# EAGLE board MotorController (EAGLE 5.10)
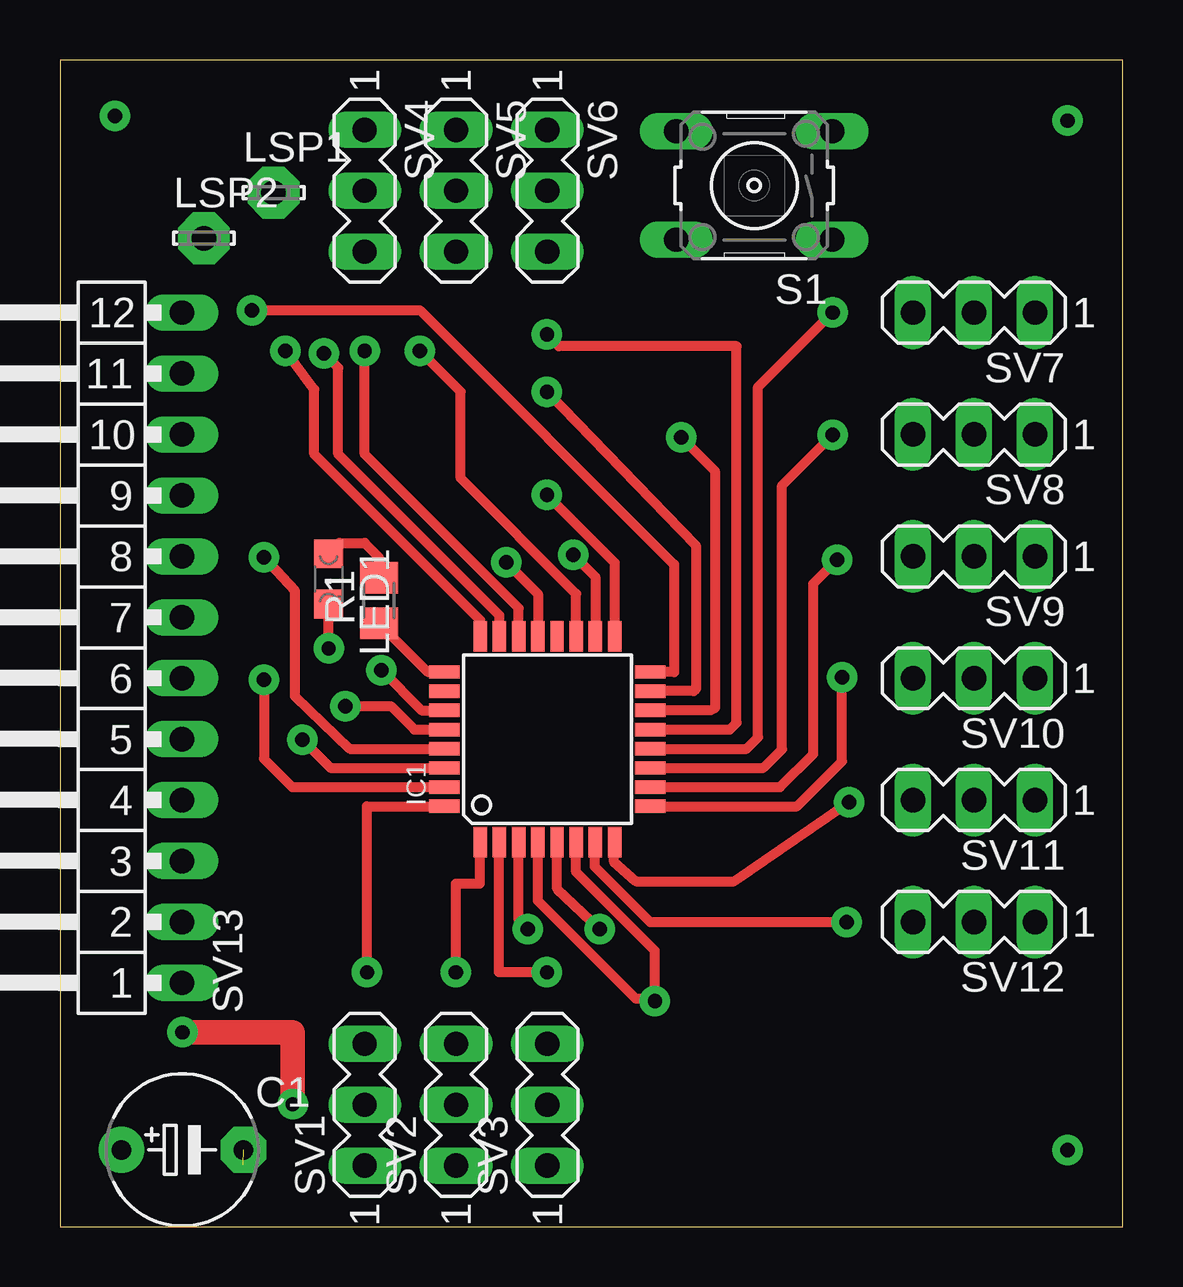
[diagram p0: board, top side]
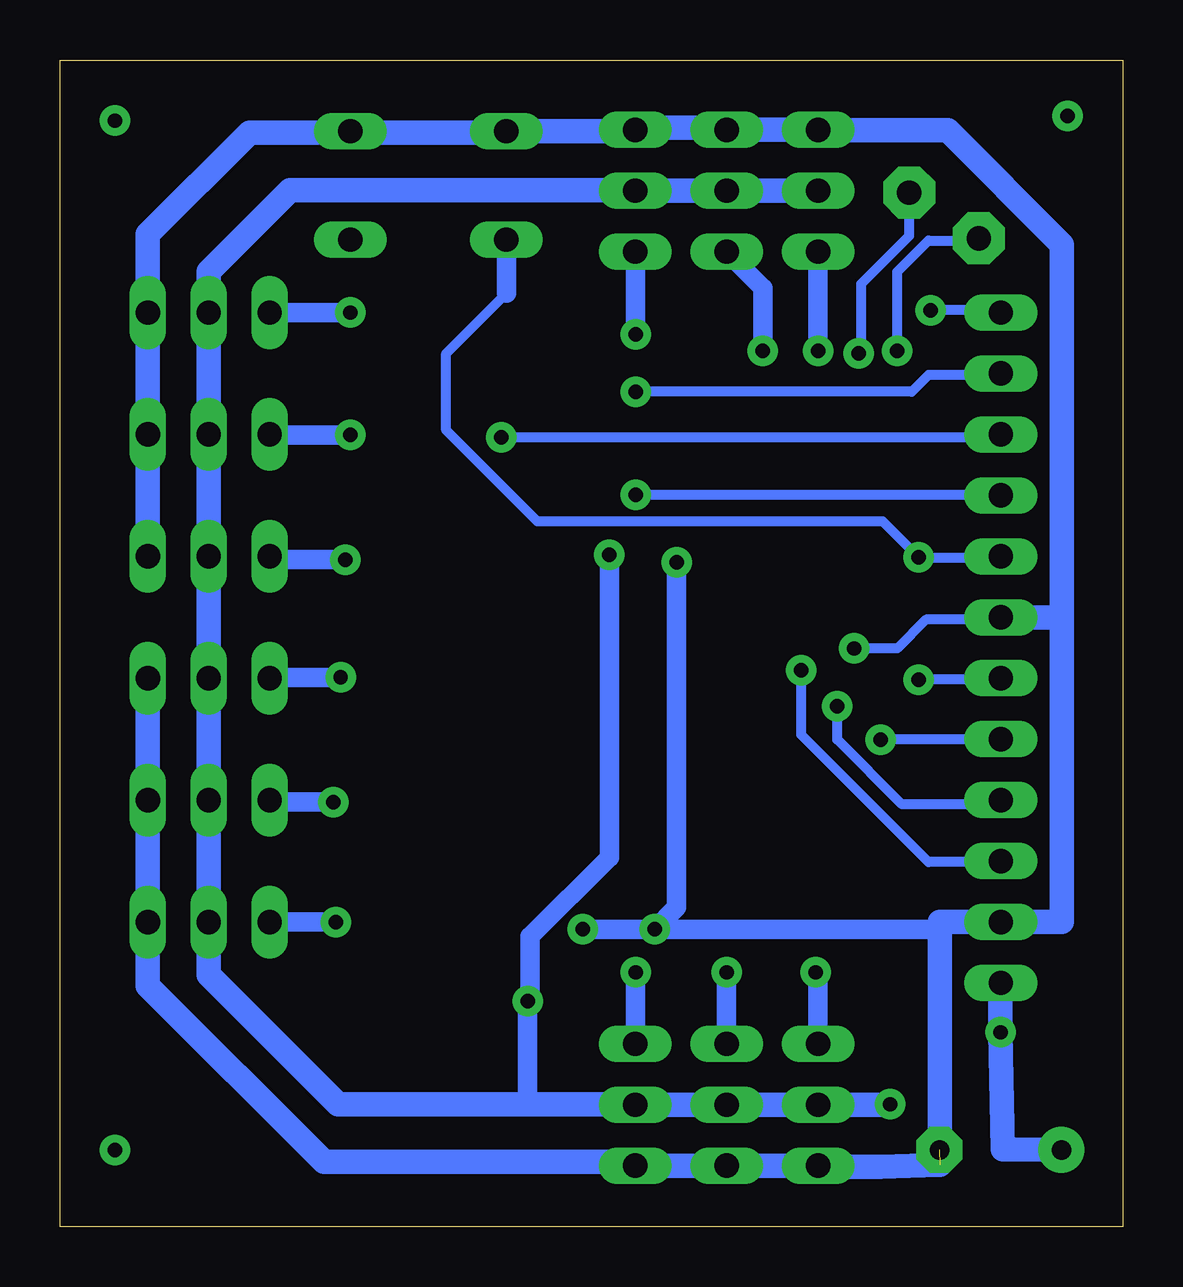
[diagram p1: board, bottom side, seen from below]

Size 44.3 x 48.63 mm. Coordinates in mm from the lower left corner, seen from the top.
Outline: 0,0 44.3,0 44.3,48.63 0,48.63 0,0
Copper layers (1*16): Top 0.035mm / dielectric 1.5mm / Bottom 0.035mm
Design rules "default": minimum track width 10mil, minimum drill 24mil, track to track 8mil, track to pad 8mil, pad to pad 8mil, via to via 8mil, smd to smd 8mil, copper to edge 40mil, drill to drill 8mil, minimum pad ring 10mil, minimum via ring 8mil, stop-mask expansion 4mil, vias tented up to drill 0mil, thermal gap 10mil

## Footprints (pad centres in the part's own frame; a part is rotated, then mirrored left to right if it is on the bottom)
E5-6 = drill 0.813 pad 1.905 round: + -2.54,0 | drill 0.813 pad 1.905 octagon: - 2.54,0
TQFP32-08 = smd 1.27 x 0.559: 1 -4.293,2.8; 2 -4.293,2; 3 -4.293,1.2; 4 -4.293,0.4; 5 -4.293,-0.4; 6 -4.293,-1.2; 7 -4.293,-2; 8 -4.293,-2.8; 17 4.293,-2.8; 18 4.293,-2; 19 4.293,-1.2; 20 4.293,-0.4; 21 4.293,0.4; 22 4.293,1.2; 23 4.293,2; 24 4.293,2.8 | smd 0.559 x 1.27: 9 -2.8,-4.293; 10 -2,-4.293; 11 -1.2,-4.293; 12 -0.4,-4.293; 13 0.4,-4.293; 14 1.2,-4.293; 15 2,-4.293; 16 2.8,-4.293; 25 2.8,4.293; 26 2,4.293; 27 1.2,4.293; 28 0.4,4.293; 29 -0.4,4.293; 30 -1.2,4.293; 31 -2,4.293; 32 -2.8,4.293
CHIPLED_0805 = smd 1.2 x 1.2: A 0,-1.05; C 0,1.05
LSP10 = drill 1.016 pad 2.159 octagon: MP 0,0
M0805 = smd 1.3 x 1.6: 1 -0.95,0; 2 0.95,0
B3F-10XX = drill 1.016 long: 1 -3.251,2.261; 2 3.251,2.261; 3 -3.251,-2.261; 4 3.251,-2.261
MA03-1 = drill 1.016 long: 1 -2.54,0; 2 0,0; 3 2.54,0
MA12-1W = drill 1.016 long: 1 -13.97,0; 2 -11.43,0; 3 -8.89,0; 4 -6.35,0; 5 -3.81,0; 6 -1.27,0; 7 1.27,0; 8 3.81,0; 9 6.35,0; 10 8.89,0; 11 11.43,0; 12 13.97,0

## Placement (x,y rotation side)
C1  [E5-6]  5.1,3.2 0 top
IC1  MEGA8-AI  [TQFP32-08]  20.32,20.32 90 top
LED1  [CHIPLED_0805]  11.2,27 180 top
LSP1  LSP10  [LSP10]  8.9,43.1 0 top
LSP2  LSP10  [LSP10]  6,41.2 0 top
R1  [M0805]  13.3,26.1 90 top
S1  [B3F-10XX]  28.94,43.4 180 top
SV1  [MA03-1]  12.7,5.08 90 top
SV2  [MA03-1]  16.51,5.08 90 top
SV3  [MA03-1]  20.32,5.08 90 top
SV4  [MA03-1]  12.7,43.18 270 top
SV5  [MA03-1]  16.51,43.18 270 top
SV6  [MA03-1]  20.32,43.18 270 top
SV7  [MA03-1]  38.1,38.1 180 top
SV8  [MA03-1]  38.1,33.02 180 top
SV9  [MA03-1]  38.1,27.94 180 top
SV10  [MA03-1]  38.1,22.86 180 top
SV11  [MA03-1]  38.1,17.78 180 top
SV12  [MA03-1]  38.1,12.7 180 top
SV13  [MA12-1W]  5.08,24.13 90 top

## Library data of the parts
C1 R1 = resistor
IC1 = atmel
LED1 = led
LSP1 LSP2 = solpad
S1 = switch-omron
SV1-SV13 = con-lstb

## Nets
GND: C1.- IC1.3 IC1.5 IC1.21 LED1.C S1.4 SV1.1 SV2.1 SV3.1 SV4.1 SV5.1 SV6.1 SV7.1 SV8.1 SV9.1 SV10.1 SV11.1 SV12.1 SV13.2 SV13.7
IN1: IC1.12 SV7.3
IN2: IC1.11 SV8.3
IN3: IC1.10 SV9.3
IN4: IC1.9 SV10.3
IN5: IC1.8 SV11.3
IN6: IC1.7 SV12.3
MISO: IC1.16 SV13.12
MOSI: IC1.15 SV13.11
N$1: IC1.23 LSP1.MP
N$2: IC1.24 LSP2.MP
N$3: IC1.25 R1.1
N$4: LED1.A R1.2
OUT1: IC1.32 SV1.3
OUT2: IC1.1 SV2.3
OUT3: IC1.2 SV3.3
OUT4: IC1.22 SV4.3
OUT5: IC1.19 SV5.3
OUT6: IC1.13 SV6.3
RESET: IC1.29 S1.2 SV13.8
RXD: IC1.30 SV13.5
SCK: IC1.17 SV13.9
SCL: IC1.28 SV13.4
SDA: IC1.27 SV13.3
SS: IC1.14 SV13.10
TXD: IC1.31 SV13.6
VCC: C1.+ IC1.4 IC1.6 IC1.18 SV1.2 SV2.2 SV3.2 SV4.2 SV5.2 SV6.2 SV7.2 SV8.2 SV9.2 SV10.2 SV11.2 SV12.2 SV13.1

## Tracks (layer width: path | path; a pad name or v marks a point on that pad's centre or on a via)
GND  (via drill 0.6 pad 1.27)  (1 unrouted)
  Top 0.406: IC1.3 19.12,12.78 v19.5,12.4 | IC1.5 20.72,14.08 v22.5,12.4 | IC1.21 19.92,26.38 v18.6,27.7 | v11.2,24.1 LED1.C
  Bottom 0.406: 7.62,12.7 7.92,12.4 | 2.54,25.5 2.64,25.4 | 12.66,2.5 SV1.1 | SV3.1 20.48,2.7 | v11.2,24.1 9.4,24.1 8.2,25.3 5.18,25.3 SV13.7
  Bottom 0.813: 7.92,12.4 v19.5,12.4 | v19.5,12.4 v22.5,12.4 | v18.6,27.7 18.6,13.3 v19.5,12.4
  Bottom 1.016: 2.64,25.4 SV13.7 | 12.66,2.5 10.1,2.5 7.62,2.58 7.62,12.7 SV13.2 2.54,12.7 2.54,25.5 2.54,40.94 7.3,45.7 12.68,45.7 SV4.1 SV5.1 16.82,45.72 16.9,45.8 20.24,45.8 SV6.1 20.38,45.66 S1.4 25.75,45.6 36.4,45.6 40.64,41.36 SV7.1 SV8.1 SV9.1 | SV1.1 SV2.1 SV3.1 | 20.48,2.7 33.3,2.7 40.64,10.04 SV12.1 SV11.1 SV10.1
IN1  (via drill 0.6 pad 1.27)
  Top 0.406: IC1.12 28.62,19.92 29.1,20.4 29.1,35 v32.2,38.1
  Bottom 0.406: v35.5,38.1 SV7.3
  Bottom 0.813: v32.2,38.1 v35.5,38.1
IN2  (via drill 0.6 pad 1.27)
  Top 0.406: IC1.11 29.32,19.12 30.1,19.9 30.1,30.9 v32.2,33
  Bottom 0.406: 35.54,33 SV8.3
  Bottom 0.813: v32.2,33 35.54,33
IN3  (via drill 0.6 pad 1.27)
  Top 0.406: IC1.10 30.02,18.32 31.4,19.7 31.4,26.8 v32.4,27.8
  Bottom 0.406: 35.42,27.8 SV9.3
  Bottom 0.813: v32.4,27.8 35.42,27.8
IN4  (via drill 0.6 pad 1.27)
  Top 0.406: IC1.9 30.72,17.52 32.6,19.4 v32.6,22.9
  Bottom 0.406: v35.5,22.9 35.52,22.9 SV10.3
  Bottom 0.813: v32.6,22.9 v35.5,22.9
IN5  (via drill 0.6 pad 1.27)
  Top 0.406: IC1.8 23.1,16.03 23.1,15.2 24,14.4 28.1,14.4 v32.9,17.7
  Bottom 0.406: v35.5,17.7 35.56,17.7 SV11.3
  Bottom 0.813: v32.9,17.7 v35.5,17.7
IN6  (via drill 0.6 pad 1.27)
  Top 0.406: IC1.7 22.3,16.03 22.3,15 24.6,12.7 v32.8,12.7
  Bottom 0.406: v35.5,12.7 SV12.3
  Bottom 0.813: v32.8,12.7 v35.5,12.7
MISO  (via drill 0.6 pad 1.27)
  Top 0.406: IC1.16 25.58,23.12 25.6,23.1 25.6,27.6 15,38.2 v8,38.2
  Bottom 0.406: v8,38.2 5.18,38.2 SV13.12
MOSI  (via drill 0.6 pad 1.27)
  Top 0.406: IC1.15 26.42,22.32 26.5,22.4 26.5,28.4 v20.3,34.8
  Bottom 0.406: v20.3,34.8 8.8,34.8 8.1,35.5 5.14,35.5 SV13.11
N$1  (via drill 0.6 pad 1.27)
  Top 0.406: IC1.23 18.32,25.48 11.6,32.2 11.6,35.8 v11,36.4
  Bottom 0.406: LSP1.MP 8.9,41.3 10.9,39.3 10.9,36.5 v11,36.4
N$2  (via drill 0.6 pad 1.27)
  Top 0.406: IC1.24 17.52,25.28 10.6,32.2 10.6,34.9 v9.4,36.5
  Bottom 0.406: v9.4,36.5 9.4,39.8 8.1,41.1 6.1,41.1 LSP2.MP
N$3
  Top 0.406: IC1.25 15.33,23.12 R1.1
N$4
  Top 0.406: R1.2 13.3,27.9 12.7,28.5 11.65,28.5 LED1.A
N$5  (via drill 0.6 pad 1.27)
  other vias: 2.3,46.3
N$6  (via drill 0.6 pad 1.27)
  other vias: 42,46.1
N$7  (via drill 0.6 pad 1.27)
  other vias: 42,3.2
N$8  (via drill 0.6 pad 1.27)
  other vias: 12.7,40.7
N$9  (via drill 0.6 pad 1.27)
  other vias: 16.5,40.6
N$10  (via drill 0.6 pad 1.27)
  other vias: 25.7,41.1
N$11  (via drill 0.6 pad 1.27)
  other vias: 16.5,7.6
N$12  (via drill 0.6 pad 1.27)
  other vias: 20.3,7.6
N$13  (via drill 0.6 pad 1.27)
  other vias: 35.6,33
N$14  (via drill 0.6 pad 1.27)
  other vias: 35.6,27.9
OUT1  (via drill 0.6 pad 1.27)
  Top 0.406: IC1.32 12.8,17.52 v12.8,10.6
  Bottom 0.406: SV1.3 v12.7,7.7
  Bottom 0.813: v12.8,10.6 12.7,10.6 SV1.3
OUT2  (via drill 0.6 pad 1.27)
  Top 0.406: IC1.1 17.5,16.03 17.5,14.3 16.5,14.3 v16.5,10.6
  Bottom 0.406: v16.51,10.6 v16.5,10.6
  Bottom 0.813: SV2.3 v16.51,10.6
OUT3  (via drill 0.6 pad 1.27)
  Top 0.406: IC1.2 18.3,16.03 18.3,10.6 v20.3,10.6
  Bottom 0.406: 20.32,10.6 v20.3,10.6
  Bottom 0.813: SV3.3 20.32,10.6
OUT4  (via drill 0.6 pad 1.27)
  Top 0.406: IC1.22 19.12,25.78 12.7,32.2 v12.7,36.5
  Bottom 0.813: v12.7,36.5 SV4.3
OUT5  (via drill 0.6 pad 1.27)
  Top 0.406: IC1.19 21.52,26.38 16.7,31.2 16.7,34.8 v15,36.5
  Bottom 0.406: SV5.3 16.7,40.45
  Bottom 0.813: v15,36.5 15,39.13 SV5.3
OUT6  (via drill 0.6 pad 1.27)
  Top 0.406: IC1.13 27.92,20.72 28.2,21 28.2,36.7 20.8,36.7 v20.3,37.2
  Bottom 0.406: v20.3,40.6 20.3,40.62 SV6.3
  Bottom 0.813: v20.3,37.2 v20.3,40.6
RESET  (via drill 0.6 pad 1.27)
  Top 0.406: IC1.29 12.08,19.92 9.8,22.1 9.8,26.5 v8.5,27.9
  Bottom 0.406: SV13.8 5.12,27.9 v8.5,27.9 10,29.4 24.4,29.4 28.2,33.2 28.2,36.4 25.69,38.91
  Bottom 0.813: 25.69,38.91 S1.2
RXD  (via drill 0.6 pad 1.27)
  Top 0.406: IC1.30 11.28,19.12 v10.1,20.3
  Bottom 0.406: v10.1,20.3 5.1,20.3 SV13.5
SCK  (via drill 0.6 pad 1.27)
  Top 0.406: IC1.17 23.12,27.68 v20.3,30.5
  Bottom 0.406: v20.3,30.5 5.1,30.5 SV13.9
SCL  (via drill 0.6 pad 1.27)
  Top 0.406: IC1.28 14.78,20.72 13.8,21.7 v11.9,21.7
  Bottom 0.406: v11.9,21.7 11.9,20.3 9.2,17.6 5.26,17.6 SV13.4
SDA  (via drill 0.6 pad 1.27)
  Top 0.406: IC1.27 15.08,21.52 v13.4,23.2
  Bottom 0.406: v13.4,23.2 13.4,20.5 8.1,15.2 5.12,15.2 SV13.3
SS  (via drill 0.6 pad 1.27)
  Top 0.406: IC1.14 27.12,21.52 27.3,21.6 27.3,31.5 v25.9,32.9
  Bottom 0.406: v25.9,32.9 5.2,32.9 SV13.10
TXD  (via drill 0.6 pad 1.27)
  Top 0.406: IC1.31 9.68,18.32 8.5,19.5 v8.5,22.8
  Bottom 0.406: v8.5,22.8 5.14,22.8 SV13.6
VCC  (via drill 0.6 pad 1.27)
  Top 0.406: IC1.6 21.52,14.78 24.8,11.5 v24.8,9.4 24.7,9.5 24,9.5 19.92,13.58 IC1.4 | IC1.18 22.32,27.08 v21.4,28
  Top 1.016: v9.7,5.1 9.7,8.1 v5.1,8.1
  Bottom 0.406: v24.8,9.4 24.7,9.5 | SV3.2 20.34,5.1 | v9.7,5.1 9.72,5.08 | 5.1,10.14 SV13.1
  Bottom 0.813: v21.4,28 21.4,15.4 24.7,12.1 24.7,9.5 | 24.8,5.1 v24.8,9.4
  Bottom 1.016: 9.72,5.08 SV1.2 SV2.2 SV3.2 | 20.34,5.1 24.8,5.1 32.7,5.1 38.1,10.5 SV12.2 SV11.2 SV10.2 SV9.2 SV8.2 | 5.1,10.14 v5.1,8.1 5,3.23 C1.+ | SV8.2 38.1,32.9 | SV8.2 SV7.2 38.1,39.8 34.7,43.2 20.34,43.2 SV6.2 SV5.2 SV4.2